# EAGLE board Projeto Euler 2022 (EAGLE 9.7.0)

Size 230.63 x 157.35 mm. Coordinates in mm from the lower left corner, seen from the top.
Outline: 0,0 230.63,0 230.63,157.35 0,157.35 0,0
Copper layers (1*16): Top 0.035mm / dielectric 1.5mm / Bottom 0.035mm
Design rules "default": minimum track width 6mil, minimum drill 0.35mm, track to track 6mil, track to pad 6mil, pad to pad 6mil, via to via 6mil, smd to smd 6mil, copper to edge 40mil, drill to drill 6mil, minimum pad ring 10mil, minimum via ring 8mil, stop-mask expansion 4mil, vias tented up to drill 0mil, thermal gap 10mil

## Footprints (pad centres in the part's own frame; a part is rotated, then mirrored left to right if it is on the bottom)
LEDRD254W60D565H860B = drill 0.981 pad 1.581: 1 -1.27,0; 2 1.27,0
MOTOR = drill 1.118 pad 3.15 octagon: + 2.54,0; - -2.54,0
RESAD1016W63L850D250B = drill 0.83 pad 1.43: 1 -5.08,0; 2 5.08,0
HA-06-SM065 = drill 1 pad 1.676: 1 -2.54,-2.54; 2 0,2.54; 3 2.54,-2.54
SWITCH-MOMENTARY-PTH-6.5MM = drill 1.016 pad 1.88: 1 -3.251,2.261; 2 3.251,2.261; 3 -3.251,-2.261; 4 3.251,-2.261
ARDUINO-UNO-R3-SHIELD = drill 1.016 pad 1.88: 3.3V 24.13,-2.54; 5V 24.13,0; A0 24.13,12.7; A1 24.13,15.24; A2 24.13,17.78; A3 24.13,20.32; A4 24.13,22.86; A5 24.13,25.4; AREF -24.13,-13.97; D2 -24.13,20.32; D3 -24.13,17.78; D4 -24.13,15.24; D5 -24.13,12.7; D6 -24.13,10.16; D7 -24.13,7.62; D8 -24.13,3.81; D9 -24.13,1.27; D10 -24.13,-1.27; D11 -24.13,-3.81; D12 -24.13,-6.35; D13 -24.13,-8.89; GND@0 24.13,2.54; GND@1 24.13,5.08; GND@2 -24.13,-11.43; IOREF 24.13,-7.62; NC 24.13,-10.16; RES 24.13,-5.08; RX -24.13,25.4; SCL -24.13,-19.05; SDA -24.13,-16.51; TX -24.13,22.86; VIN 24.13,7.62
JHD-162A = drill 1.016 long: 1 -19.05,0; 2 -16.51,0; 3 -13.97,0; 4 -11.43,0; 5 -8.89,0; 6 -6.35,0; 7 -3.81,0; 8 -1.27,0; 9 1.27,0; 10 3.81,0; 11 6.35,0; 12 8.89,0; 13 11.43,0; 14 13.97,0; 15 16.51,0; 16 19.05,0

## Placement (x,y rotation side)
D2  RED  [LEDRD254W60D565H860B]  54.52,146.18 180 top
M1  MOTOR_HDR  [MOTOR]  8.26,139.34 0 top
R1  10k  [RESAD1016W63L850D250B]  60.87,133.48 90 top
R2  220  [RESAD1016W63L850D250B]  194.05,84.76 270 top
R3  10  [RESAD1016W63L850D250B]  55.79,141.1 90 top
R13  10k  [RESAD1016W63L850D250B]  71.03,133.48 90 top
R14  10k  [RESAD1016W63L850D250B]  81.19,133.48 90 top
R15  10k  [RESAD1016W63L850D250B]  91.35,133.48 90 top
RPOT1  250k  [HA-06-SM065]  153.41,64.44 0 top
S1  SWITCH_MOMENTARY  [SWITCH-MOMENTARY-PTH-6.5MM]  63.41,149.99 90 top
S11  SWITCH_MOMENTARY  [SWITCH-MOMENTARY-PTH-6.5MM]  73.57,149.99 90 top
S12  SWITCH_MOMENTARY  [SWITCH-MOMENTARY-PTH-6.5MM]  83.73,149.99 90 top
S13  SWITCH_MOMENTARY  [SWITCH-MOMENTARY-PTH-6.5MM]  93.89,149.99 90 top
U1  ARDUINO-UNO-R3-SHIELD  [ARDUINO-UNO-R3-SHIELD]  90.47,69.65 270 top
U2  LCD-16X2JHD-162A  [JHD-162A]  175,36.63 0 top

## Library data of the parts
D2 = Tinkercad; CATEGORY: Opto-Electronic; SUB-CATEGORY: LED; VALUE: LED_RED
M1 R1-R3 R13-R15 RPOT1 S1 S11-S13 U1 U2 = Tinkercad

## Nets
U1_5V: R2.1 RPOT1.1 S1.3 S1.4 S11.3 S11.4 S12.3 S12.4 S13.3 S13.4 U1.5V U2.2
U1_D2: U1.D2 U2.14
U1_D3: U1.D3 U2.13
U1_D4: U1.D4 U2.12
U1_D5: U1.D5 U2.11
U1_D6: U1.D6 U2.6
U1_D7: U1.D7 U2.4
U1_D8: R15.2 S13.1 S13.2 U1.D8
U1_D9: R14.2 S12.1 S12.2 U1.D9
U1_D10: R13.2 S11.1 S11.2 U1.D10
U1_D11: R1.2 S1.1 S1.2 U1.D11
U1_D12: M1.+ U1.D12
U1_D13: D2.1 R3.1 R3.2 U1.D13
U1_GND: D2.2 M1.- R1.1 R13.1 R14.1 R15.1 RPOT1.3 U1.GND@0 U1.GND@1 U1.GND@2 U2.1 U2.5 U2.16
U2_LED+: R2.2 U2.15
U2_VO: RPOT1.2 U2.3

## Tracks (layer width: path | path; a pad name or v marks a point on that pad's centre or on a via)
U1_5V  (11 unrouted)
U1_D2  (1 unrouted)
U1_D3  (1 unrouted)
U1_D4  (1 unrouted)
U1_D5  (1 unrouted)
U1_D6  (1 unrouted)
U1_D7  (1 unrouted)
U1_D8  (3 unrouted)
U1_D9  (3 unrouted)
U1_D10  (3 unrouted)
U1_D11  (3 unrouted)
U1_D12  (1 unrouted)
U1_D13  (3 unrouted)
U1_GND  (12 unrouted)
U2_LED+  (1 unrouted)
U2_VO  (1 unrouted)